# EAGLE board MotorControl_211009 (EAGLE 9.6.2)
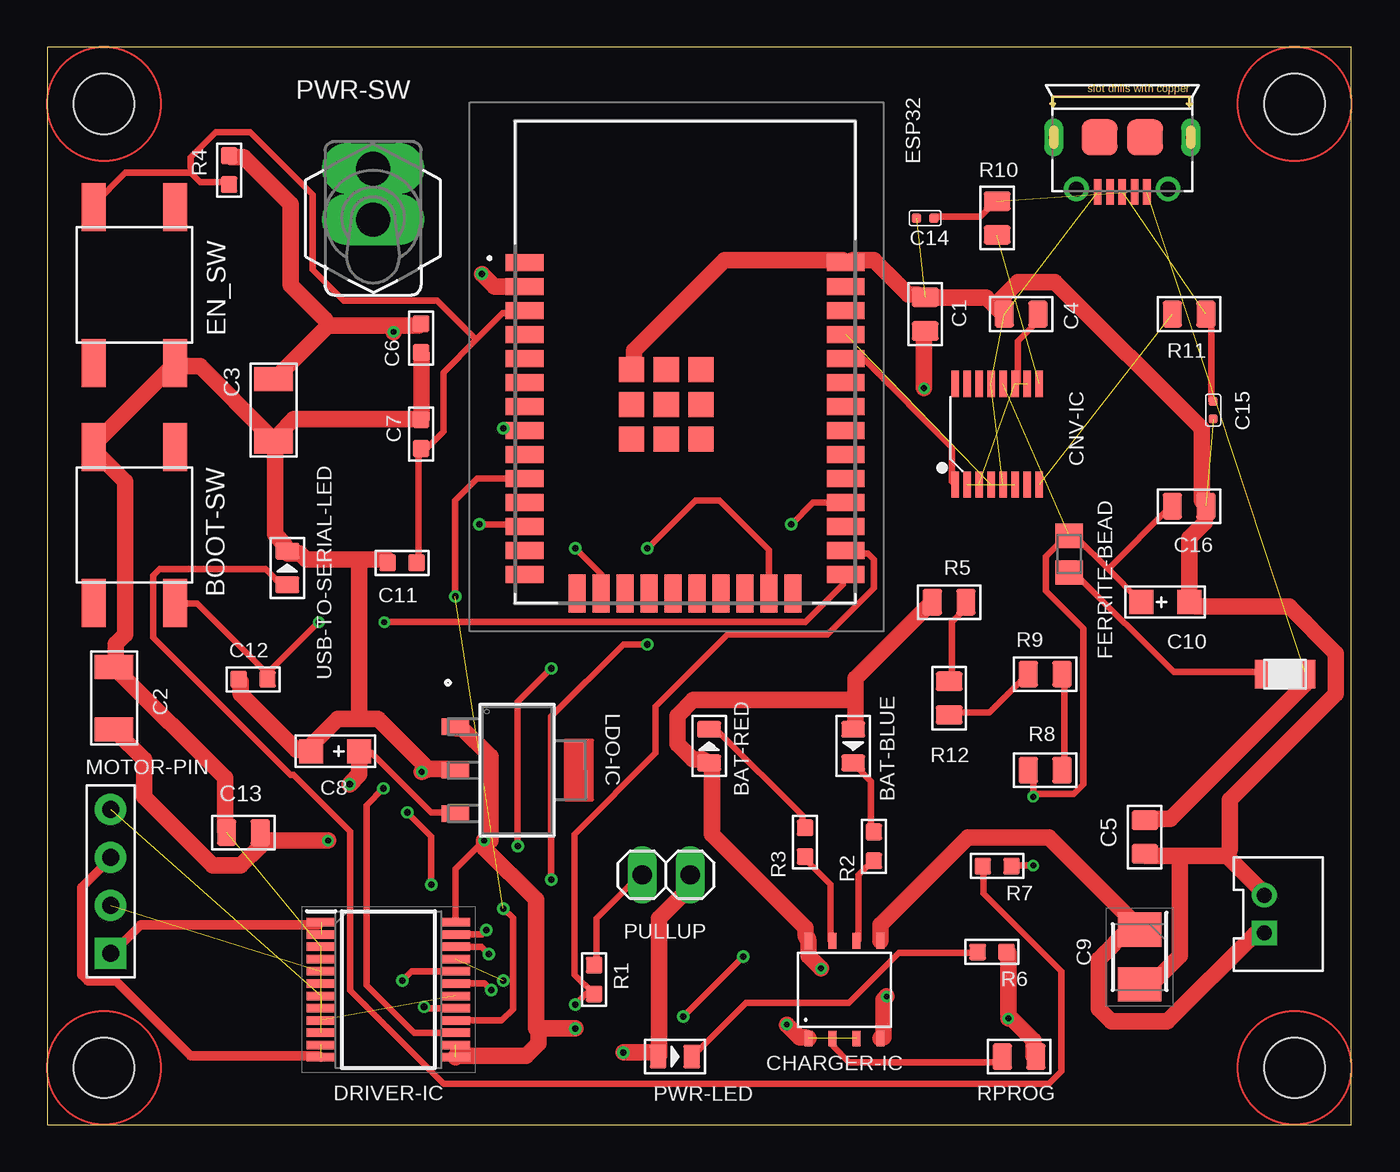
[diagram p0: board, top side]
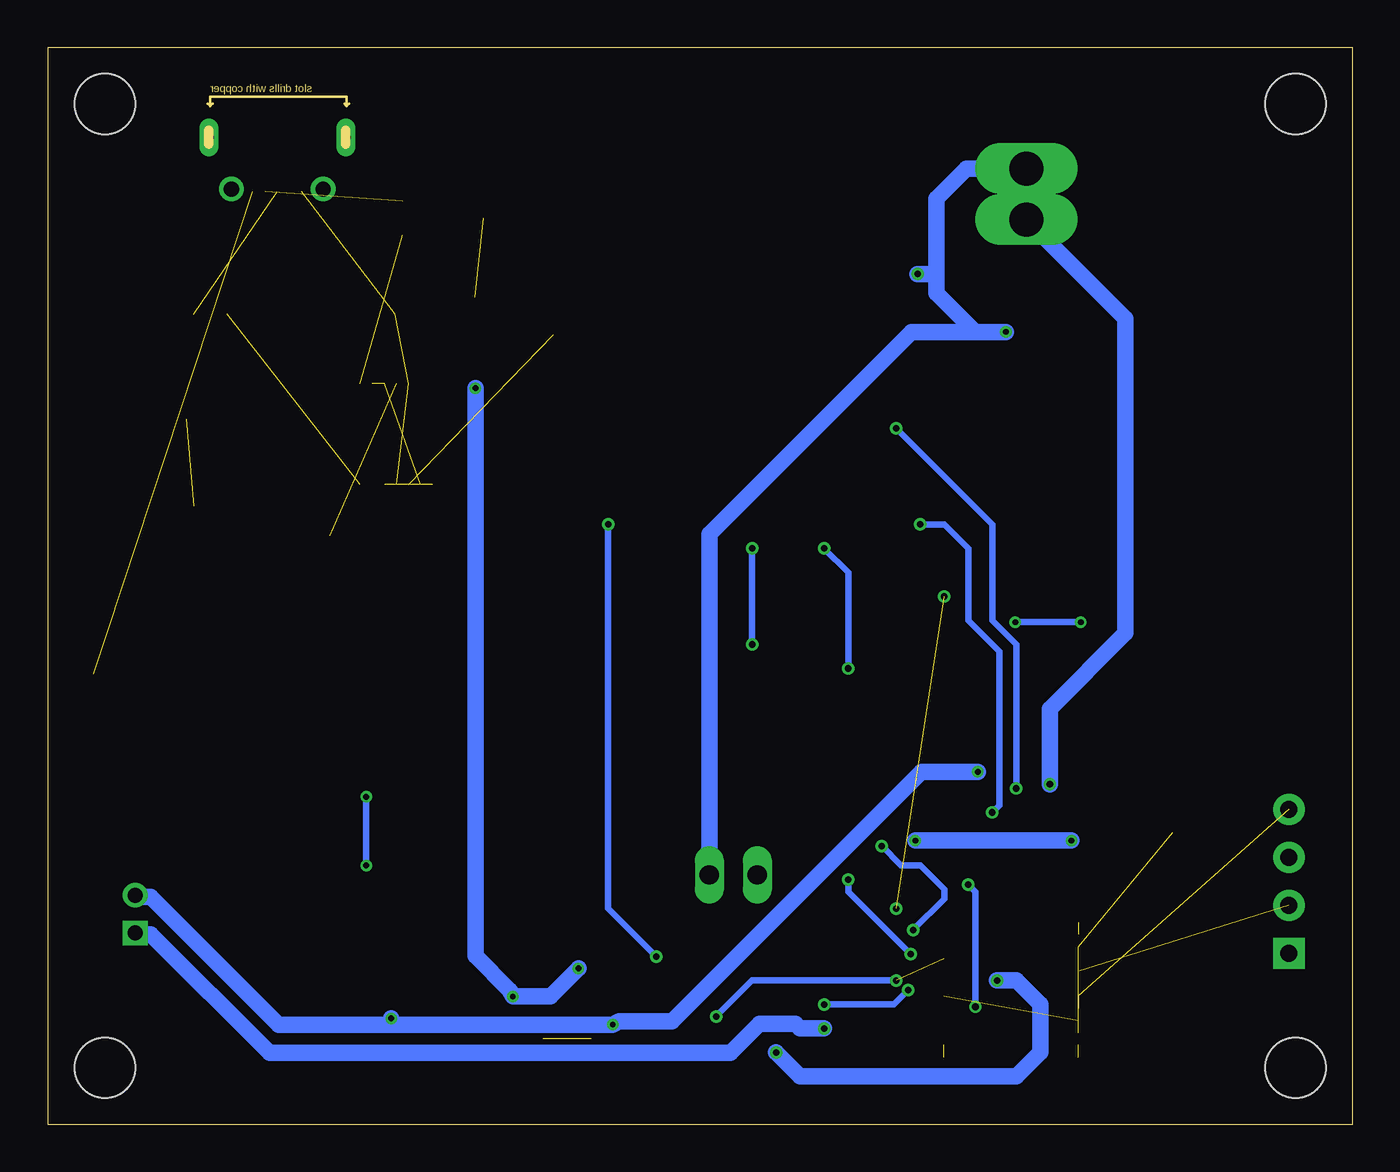
[diagram p1: board, bottom side, seen from below]

Size 69 x 57.02 mm. Coordinates in mm from the lower left corner, seen from the top.
Outline: 0,0 69,0.01 69,57.02 0.01,57.01 0,0
Copper layers (1*16): Top 0.035mm / dielectric 1.5mm / Bottom 0.035mm
Design rules "SeeedStudio_2layer_DRU_no_angle_20140221": minimum track width 6mil, minimum drill 12mil, track to track 6mil, track to pad 6mil, pad to pad 6mil, via to via 6mil, smd to smd 0mil, copper to edge 10mil, drill to drill 10mil, minimum pad ring 10mil, minimum via ring 6mil, stop-mask expansion 2mil, vias tented up to drill 100mil, thermal gap 10mil
Net classes: 0 default: width 0.356 mm, clearance 0.305 mm; 1 Power: width 0.864 mm, clearance 0.508 mm; 2 Motor: width 0.508 mm, clearance 0.356 mm
Holes 3.2 mm at 3,3.01 3,54.01 66,3.01 66,54.01

## Footprints (pad centres in the part's own frame; a part is rotated, then mirrored left to right if it is on the bottom)
H2-2.0-6X4.5MM = drill 0.8 pad 1.3 square: + -1,0.75 | drill 0.8 pad 1.3: - 1,0.75
LED-0805 = smd 0.889 x 1.27: + -0.889,0; - 0.889,0
SW4-SMD-6.0X6.0X5.0MM = smd 2.54 x 1.27: 1 -4.129,2.159; 2 -4.129,-2.159; 3 4.129,-2.159; 4 4.129,2.159
C0805 = smd 1.397 x 1.016: 1 0,0.889; 2 0,-0.889
C1206 = smd 1.27 x 2.032: 1 -1.651,0; 2 1.651,0
C0603 = smd 0.889 x 0.889: 1 0,0.762; 2 0,-0.762
AVX-A = smd 1.27 x 1.27: + -1.27,0; - 1.27,0
CAPPM3528X210N = smd 1.8 x 2.3: 1 -1.45,0; 2 1.45,0
C0402 = smd 0.5 x 0.5: 1 0,0.463; 2 0,-0.463
SOT23-8 = smd 0.42 x 0.835: 1 -1.905,-2.58; 2 -0.635,-2.58; 3 0.635,-2.58; 4 1.905,-2.58; 5 1.905,2.58; 6 0.635,2.58; 7 -0.635,2.58; 8 -1.905,2.58
SSOP16-0.635-5X4MM = smd 0.381 x 1.397: 1 -2.223,-2.667; 2 -1.587,-2.667; 3 -0.953,-2.667; 4 -0.318,-2.667; 5 0.318,-2.667; 6 0.953,-2.667; 7 1.587,-2.667; 8 2.223,-2.667; 9 2.223,2.667; 10 1.587,2.667; 11 0.953,2.667; 12 0.318,2.667; 13 -0.318,2.667; 14 -0.953,2.667; 15 -1.587,2.667; 16 -2.223,2.667
SOP65P760X160-24N = smd 1.525 x 0.45: 1 -3.562,3.575; 2 -3.562,2.925; 3 -3.562,2.275; 4 -3.562,1.625; 5 -3.562,0.975; 6 -3.562,0.325; 7 -3.562,-0.325; 8 -3.562,-0.975; 9 -3.562,-1.625; 10 -3.562,-2.275; 11 -3.562,-2.925; 12 -3.562,-3.575; 13 3.562,-3.575; 14 3.562,-2.925; 15 3.562,-2.275; 16 3.562,-1.625; 17 3.562,-0.975; 18 3.562,-0.325; 19 3.562,0.325; 20 3.562,0.975; 21 3.562,1.625; 22 3.562,2.275; 23 3.562,2.925; 24 3.562,3.575
ESP32WROOM32E8MB = smd 2 x 0.9: 1 -8.5,5.26; 2 -8.5,3.99; 3 -8.5,2.72; 4 -8.5,1.45; 5 -8.5,0.18; 6 -8.5,-1.09; 7 -8.5,-2.36; 8 -8.5,-3.63; 9 -8.5,-4.9; 10 -8.5,-6.17; 11 -8.5,-7.44; 12 -8.5,-8.71; 13 -8.5,-9.98; 14 -8.5,-11.25; 25 8.5,-11.25; 26 8.5,-9.98; 27 8.5,-8.71; 28 8.5,-7.44; 29 8.5,-6.17; 30 8.5,-4.9; 31 8.5,-3.63; 32 8.5,-2.36; 33 8.5,-1.09; 34 8.5,0.18; 35 8.5,1.45; 36 8.5,2.72; 37 8.5,3.99; 38 8.5,5.26 | smd 0.9 x 2: 15 -5.715,-12.25; 16 -4.445,-12.25; 17 -3.175,-12.25; 18 -1.905,-12.25; 19 -0.635,-12.25; 20 0.635,-12.25; 21 1.905,-12.25; 22 3.175,-12.25; 23 4.445,-12.25; 24 5.715,-12.25 | smd 1.33 x 1.33: 39 -2.835,-0.405; 40 -1,-0.405; 41 0.835,-0.405; 42 -2.835,-2.24; 43 -1,-2.24; 44 0.835,-2.24; 45 -2.835,-4.075; 46 -1,-4.075; 47 0.835,-4.075
FB_LI0805H151R-10 = smd 1.285 x 1.47: 1 -0.973,0; 2 0.973,0
SMD0805R035SF = smd 1 x 1.5: 1 -1.1,0; 2 1.1,0
SOT-223-3_VAR-AA = smd 0.889 x 1.473: 1 -2.3,-3.264; 2 0,-3.264; 3 2.3,-3.264
H4-2.54 = drill 0.889 pad 1.651 square: 1 0,3.81 | drill 0.889 pad 1.651: 2 0,1.27; 3 0,-1.27; 4 0,-3.81
1X02 = drill 1.016 long: 1 -1.27,0; 2 1.27,0
MS243 = drill 1.803 pad 2 long: 1 0,-1.346; 2 0,1.346
R0603 = smd 0.889 x 0.889: 1 0,0.762; 2 0,-0.762
R0805 = smd 1.397 x 1.016: 1 0,0.889; 2 0,-0.889
MICRO-USB5+6P-SMD-0.65-AB = smd 0.4 x 1.35: 1 -1.3,2.875; 2 -0.65,2.875; 3 0,2.875; 4 0.65,2.875; 5 1.3,2.875 | smd 1.9 x 1.9: P1 -1.2,0; P2 1.2,0 | drill 0.508 pad 1.016 long: P3 -3.625,0; P4 3.625,0 | drill 0.8: P5 -2.425,2.73; P6 2.425,2.73

## Placement (x,y rotation side)
BAT  2p-2.0  [H2-2.0-6X4.5MM]  65.15,11.14 90 top
BAT-BLUE  CLEAR-BLUE-0805  [LED-0805]  42.64,20.03 270 top
BAT-RED  RED-0805  [LED-0805]  35.02,20.03 90 top
BOOT-SW  [SW4-SMD-6.0X6.0X5.0MM]  4.62,31.73 90 top
C1  100nf  [C0805]  46.45,42.89 0 top
C2  10uf  [C1206]  3.54,22.57 270 top
C3  22uF/16V(10%)  [C1206]  11.97,37.81 90 top
C4  100nf  [C0805]  51.53,42.89 90 top
C5  10nf  [C0805]  58.07,15.22 0 top
C6  100nF/50V(10%)  [C0603]  19.78,41.62 180 top
C7  100nF/50V(10%)  [C0603]  19.78,36.54 0 top
C8  10uf  [AVX-A]  15.24,19.76 180 top
C9  6.8uF  [CAPPM3528X210N]  57.8,8.87 270 top
C10  4.7uf  [AVX-A]  59.15,27.65 0 top
C11  100nF/50V(10%)  [C0603]  18.78,29.73 90 top
C12  100nF/50V(10%)  [C0603]  10.89,23.57 90 top
C13  10uf  [C0805]  10.38,15.46 90 top
C14  47PF  [C0402]  46.45,47.97 270 top
C15  47PF  [C0402]  61.69,37.81 0 top
C16  100nf  [C0805]  60.42,32.73 270 top
CHARGER-IC  TP4056  [SOT23-8]  42.18,7.14 0 top
CNV-IC  INTERFACE-FT230XS-R(SSOP16)  [SSOP16-0.635-5X4MM]  50.26,36.54 0 top
DRIVER-IC  TB6612FNG  [SOP65P760X160-24N]  18.05,7.14 0 top
EN_SW  [SW4-SMD-6.0X6.0X5.0MM]  4.62,44.43 270 top
ESP32  ESP32-WROOM-32E8M  [ESP32WROOM32E8MB]  33.75,40.35 0 top
FERRITE-BEAD  LI0805H151R-10  [FB_LI0805H151R-10]  54.07,30.19 270 top
HUSE  SMD0805R035SF  [SMD0805R035SF]  65.5,23.84 0 top
LDO-IC  SPX3940AM3-L-3-3/TR  [SOT-223-3_VAR-AA]  24.86,18.76 270 top
MOTOR-PIN  4p-2.54  [H4-2.54]  3.35,12.87 180 top
PULLUP  [1X02]  32.75,13.22 180 top
PWR-LED  YELLOW-0805  [LED-0805]  33.21,3.6 0 top
PWR-SW  [MS243]  17.24,49.24 0 top
R1  10K  [R0603]  28.94,7.68 180 top
R2  1K  [R0603]  43.73,14.73 0 top
R3  1K  [R0603]  40.1,14.95 0 top
R4  10K  [R0603]  9.62,50.51 180 top
R5  0.1R  [R0805]  47.72,27.65 270 top
R6  300R  [R0603]  49.99,9.14 90 top
R7  1K  [R0603]  50.26,13.68 90 top
R8  0.1R  [R0805]  52.8,18.76 90 top
R9  0.1R  [R0805]  52.8,23.84 270 top
R10  27R  [R0805]  50.26,47.97 0 top
R11  27R  [R0805]  60.42,42.89 270 top
R12  0.1R  [R0805]  47.72,22.57 180 top
RPROG  1.2K  [R0805]  51.42,3.6 270 top
USB1  ZX62-B-5PA  [MICRO-USB5+6P-SMD-0.65-AB]  56.88,52.24 180 top
USB-TO-SERIAL-LED  GREEN-0805  [LED-0805]  12.7,29.46 90 top

## Library data of the parts
BAT = OPL_Connector
BAT-BLUE = OPL_Optoelectronics; MPN: EL-17-215/BHC-AN1P2/3T
BAT-RED = OPL_Optoelectronics; MPN: 17-215SURC/S530-A2/TR8
BOOT-SW EN_SW = OPL_Switch; MPN: DTSM-62K-S-V-T/R(SN431)
C1 C4 C16 = OPL_Capacitor; MPN: CC0805KRX7R9BB104
C2 = OPL_Capacitor; MPN: CC1206KKX5R8BB106
C3 = OPL_Capacitor
C5 = OPL_Capacitor; MPN: CC0805JRX7R9BB103
C6 C7 C11 C12 = OPL_Capacitor; MPN: CC0603KRX7R9BB104
C8 = OPL_Capacitor; MPN: TAJA106K016RNJ
C9 = TCJB685M025R0150; MPN: TCJB685M025R0150
C10 = OPL_Capacitor; MPN: TAJA475*016#NJ
C13 = OPL_Capacitor; MPN: CC0805KKX5R8BB106
C14 C15 = OPL_Capacitor; MPN: CC0402JRNPO9BN470
CHARGER-IC = TP4056
CNV-IC = INTERFACE-FT230XS-R_SSOP16_; AVAILABILITY: In Stock; DESCRIPTION: USB Bridge, USB to UART USB 2.0 UART Interface 16-SSOP; MF: FTDI,; MP: FT230XS-R; PACKAGE: SSOP-16 FTDI; PRICE: None; PURCHASE-URL: https://pricing.snapeda.com/search/part/FT230XS-R/?ref=eda
DRIVER-IC = TB6612FNG; DESCRIPTION: Brush motor driver IC; HEIGHT: 1.6mm; MANUFACTURER_NAME: Toshiba; MANUFACTURER_PART_NUMBER: TB6612FNG
ESP32 = ESP32-WROOM-32; DESCRIPTION: WiFi Modules (802.11) Mod 8 MB SPI flash PCB antenna; HEIGHT: 3.2mm; MANUFACTURER_NAME: Espressif Systems; MANUFACTURER_PART_NUMBER: ESP32-WROOM-32E (8MB); MOUSER_PART_NUMBER: 356-ESP32WRM32E164PH; MOUSER_PRICE-STOCK: https://www.mouser.co.uk/ProductDetail/Espressif-Systems/ESP32-WROOM-32E-8MB?qs=GBLSl2AkirsjshqvD9slKA%3D%3D
FERRITE-BEAD = LI0805H151R-10; AVAILABILITY: In Stock; DESCRIPTION: 150 Ohms @ 100MHz 1 Power, Signal Line Ferrite Bead 0805 (2012 Metric) 800mA 150mOhm; MF: Laird-Signal Integrity; MP: LI0805H151R-10; PACKAGE: 0805 Laird; PRICE: None; PURCHASE-URL: https://pricing.snapeda.com/search/part/LI0805H151R-10/?ref=eda
HUSE = SMD0805R035SF
LDO-IC = SPX3940AM3-L-3-3:TR; BUILT_BY: EMA_Jessica; COPYRIGHT: Copyright (C) 2018 Accelerated Designs. All rights reserved; MANUFACTURER_PART_NUMBER: SPX3940AM3-L-3-3/TR; SOURCELIBRARY: Exar_2019-09-16; VENDOR: Exar
MOTOR-PIN = OPL_Connector; MPN: F185-1104A1BSYA1
PULLUP = pinhead
PWR-LED = OPL_Optoelectronics; MPN: 17-215UYC/S530-A3/TR8
PWR-SW = switch
R1 R4 = OPL_Resistor; MPN: RC0603FR-0710KL
R2 R3 R7 = OPL_Resistor; MPN: RC0603FR-071KL
R5 R8 R9 R12 = OPL_Resistor; MPN: RL0805JR-070R1L
R6 = OPL_Resistor; MPN: RC0603FR-071K5L
R10 R11 RPROG = OPL_Resistor; MPN: RC0805JR-071KL
USB1 = OPL_Connector; MPN: ZX62-B-5PA
USB-TO-SERIAL-LED = OPL_Optoelectronics; MPN: 17-215SYGC/S530-E2/TR8

## Nets
+3V3 [Power]: C3.2 C6.2 DRIVER-IC.20 ESP32.2 PULLUP.1 PWR-LED.+ PWR-SW.2 R4.2
AIN1: DRIVER-IC.21 ESP32.28
AIN2: DRIVER-IC.22 ESP32.23
AO1 [Motor]: DRIVER-IC.1 DRIVER-IC.2 MOTOR-PIN.1
AO2 [Motor]: DRIVER-IC.5 DRIVER-IC.6 MOTOR-PIN.2
B+ [Power]: BAT.+ C2.2 C9.1 C13.2 CHARGER-IC.5 DRIVER-IC.13 DRIVER-IC.14 DRIVER-IC.24 LDO-IC.1
BIN1: DRIVER-IC.17 ESP32.12
BIN2: DRIVER-IC.16 ESP32.10
BO1 [Motor]: DRIVER-IC.11 DRIVER-IC.12 MOTOR-PIN.3
BO2 [Motor]: DRIVER-IC.7 DRIVER-IC.8 MOTOR-PIN.4
GND [Power]: BAT.- BOOT-SW.4 C1.1 C2.1 C3.1 C4.1 C5.2 C6.1 C7.1 C8.- C9.2 C10.- C11.1 C12.1 C13.1 C14.2 C15.2 C16.1 CHARGER-IC.1 CHARGER-IC.3 CNV-IC.5 CNV-IC.13 DRIVER-IC.3 DRIVER-IC.4 DRIVER-IC.9 DRIVER-IC.10 DRIVER-IC.18 EN_SW.4 ESP32.38 ESP32.39 LDO-IC.2 R6.2 RPROG.1 USB1.5 USB-TO-SERIAL-LED.-
N$2: BAT-RED.- R3.1
N$3: R7.1 USB-TO-SERIAL-LED.+
N$4: FERRITE-BEAD.2 HUSE.1
N$5: C4.2 CNV-IC.3 CNV-IC.10 CNV-IC.11
N$6: CNV-IC.2 CNV-IC.6
N$7: CNV-IC.9 R10.2
N$8: CNV-IC.8 R11.2
N$9: C14.1 R10.1 USB1.2
N$11: CHARGER-IC.7 R3.2
N$12: CHARGER-IC.6 R2.2
N$13: BAT-BLUE.- R2.1
N$14: PWR-LED.- R6.1
N$15: C15.1 R11.1 USB1.3
N$16: CHARGER-IC.2 RPROG.2
N$17: R8.2 R9.1
N$18: R9.2 R12.1
N$19: C10.+ C16.2 CNV-IC.12 FERRITE-BEAD.1 R7.2 R8.1
N$20: R5.1 R12.2
N$25: PULLUP.2 R1.2
N$29: C7.2 C11.2 EN_SW.2 ESP32.3 R4.1
N$30: BOOT-SW.2 C12.2 ESP32.25
POWER_SW: C8.+ LDO-IC.3 PWR-SW.1
PWMA: DRIVER-IC.23 ESP32.16
PWMB: DRIVER-IC.15 ESP32.8
RXD: CNV-IC.4 ESP32.35
STBY: DRIVER-IC.19 ESP32.26 R1.1
TXD: CNV-IC.1 ESP32.34
VBUS [Power]: C5.1 HUSE.2 USB1.1
VIN+ [Power]: BAT-BLUE.+ BAT-RED.+ C1.2 CHARGER-IC.4 CHARGER-IC.8 R5.2

## Tracks (layer width: path | path; a pad name or v marks a point on that pad's centre or on a via)
+3V3  (via drill 0.3, 0.35)
  Top 0.356: DRIVER-IC.20 19.28,8.12 v18.8,7.63 | 32.1,3.82 PWR-LED.+
  Top 0.864: PWR-LED.+ 32.36,3.65 32.36,10.91 34.01,12.56 PULLUP.1 | 14.86,42.28 18.33,42.28 | 18.33,42.28 19.65,42.28 C6.2 | 14.86,42.28 12.05,39.47 C3.2 | R4.2 9.74,51.2 10.4,51.2 12.88,48.72 12.88,44.43 14.69,42.61 14.86,42.28 | v18.33,41.95 18.33,42.28 | ESP32.2 23.67,44.34 v23,45.01 | v30.48,3.82 32.1,3.82
  Bottom 0.864: PULLUP.1 34.01,13.39 34.01,31.27 23.33,41.95 v18.33,41.95 19.93,41.95 22,44.01 22,45.01 | PWR-SW.2 20.42,50.59 22,49.01 22,45.01 | v23,45.01 22,45.01 | v18.8,7.63 17.78,7.63 16.51,6.36 16.51,3.82 17.78,2.55 29.21,2.55 v30.48,3.82
AIN1  (via drill 0.35)  (1 unrouted)
  Top 0.356: ESP32.28 40.52,32.91 v39.37,31.76 | v36.83,8.9 v33.66,5.73
  Bottom 0.356: v39.37,31.76 39.37,13.98 39.37,11.44 v36.83,8.9 | v33.66,5.73 31.75,7.63 v24.13,7.63
AIN2  (via drill 0.35)
  Top 0.356: DRIVER-IC.22 22.98,9.42 v23.37,9.03 | v26.67,12.97 26.67,21.6 30.48,25.41 v31.75,25.41 | v31.75,30.49 34.29,33.03 35.56,33.03 38.2,30.4 ESP32.23
  Bottom 0.356: v23.37,9.03 26.67,12.33 v26.67,12.97 | v31.75,25.41 v31.75,30.49
AO1  (1 unrouted)
  Top 0.508: DRIVER-IC.1 14.36,10.58 4.95,10.58 3.47,9.09 MOTOR-PIN.1
AO2  (2 unrouted)
B+  (via drill 0.3, 0.35)  (1 unrouted)
  Top 0.356: DRIVER-IC.24 21.61,13.54 v23.11,15.04
  Top 0.864: CHARGER-IC.5 44.08,9.75 44.08,10.58 48.7,15.2 53,15.2 57.78,10.41 C9.1 57.29,10.41 55.64,8.76 55.64,6.12 56.3,5.46 59.27,5.46 63.89,10.08 64.39,10.08 BAT.+ | C2.2 3.63,20.82 5.12,19.33 5.12,17.35 8.75,13.72 10.24,13.72 11.23,14.71 11.23,15.37 C13.2 11.56,15.04 v14.86,15.04 | LDO-IC.1 21.63,20.98 21.96,20.98 23.44,19.5 23.44,15.04 v23.11,15.04 23.11,14.66 25.86,11.91 25.86,5.09 25.98,5.09 | DRIVER-IC.13 21.63,3.65 25.32,3.65 25.98,4.31 25.98,5.09 | v27.94,5.09 25.98,5.09
  Bottom 0.864: v23.11,15.04 v14.86,15.04 | BAT.+ 64.39,10.08 63.56,10.08 57.29,3.81 32.91,3.81 31.37,5.35 29.46,5.35 29.21,5.09 v27.94,5.09
BIN1  (via drill 0.35)
  Top 0.356: DRIVER-IC.17 20.01,6.17 v19.94,6.24 | v20.32,12.71 20.32,15.25 v19.05,16.52 | ESP32.12 25.13,31.76 v22.86,31.76
  Bottom 0.356: v19.94,6.24 19.94,12.33 v20.32,12.71 | v19.05,16.52 18.67,16.9 18.67,25.03 20.32,26.68 20.32,30.49 21.59,31.76 v22.86,31.76
BIN2  (via drill 0.35)  (1 unrouted)
  Top 0.356: DRIVER-IC.16 24.05,5.52 24.64,6.11 24.64,10.94 v24.13,11.44 | ESP32.10 22.74,34.18 21.59,33.03 v21.59,27.95
BO1  (1 unrouted)
  Top 0.508: DRIVER-IC.12 14.36,3.65 7.59,3.65 3.63,7.61 2.15,7.61 1.82,7.94 1.82,12.56 3.3,14.05 MOTOR-PIN.3
BO2  (2 unrouted)
GND  (via drill 0.3)  (11 unrouted)
  Top 0.864: C13.1 9.41,15.53 9.41,18.34 3.63,24.12 C2.1 3.63,24.61 3.63,25.44 4.13,25.93 4.13,34.03 2.64,35.51 BOOT-SW.4 2.48,36.01 EN_SW.4 7.1,40.13 8.09,40.13 11.72,36.5 C3.1 | C12.1 10.24,23.46 10.24,22.8 13.21,19.83 13.87,19.83 C8.- 14.03,20.16 15.35,21.48 16.51,21.48 | 20.14,18.84 21.46,18.84 LDO-IC.2 | 20.14,18.84 17.5,21.48 16.51,21.48 | C6.1 19.81,40.79 19.81,37.33 C7.1 19.48,37.33 13.04,37.33 12.22,36.5 C3.1 | 16.51,29.9 13.7,29.9 13.37,30.23 12.71,30.23 USB-TO-SERIAL-LED.- 12.55,30.72 12.05,31.22 12.05,36.01 C3.1 | 16.51,29.9 18,29.9 C11.1 | 16.51,29.9 16.51,21.48 | 50.85,5.79 50.85,9.09 R6.2 | 50.85,5.79 52.17,4.47 52.17,3.65 RPROG.1 | v39.13,5.3 39.79,4.64 40.12,4.64 CHARGER-IC.1 | 62.41,14.21 59.93,14.21 | 59.93,14.21 58.12,14.21 C5.2 | 62.41,14.21 64.39,12.23 BAT.- | 59.93,14.21 59.93,8.93 58.45,7.44 57.95,7.44 C9.2 | v50.85,5.63 50.85,5.79 | 50.11,43.35 50.52,42.94 C4.1 | 50.11,43.35 49.7,43.77 46.56,43.77 C1.1 46.06,43.93 45.57,43.93 43.75,45.75 42.6,45.75 ESP32.38 42.1,45.75 35.83,45.75 31.04,40.96 31.04,39.97 ESP32.39 | 50.11,43.35 51.35,44.59 53.33,44.59 61.09,36.83 61.09,33.03 C16.1 61.25,32.7 61.25,31.88 60.43,31.05 60.43,27.75 C10.- 60.76,27.42 65.71,27.42 68.19,24.94 68.19,22.8 62.57,17.18 62.57,14.54 62.41,14.21 | v19.81,18.67 20.14,18.84
  Bottom 0.864: 50.85,5.3 56.79,5.3 63.56,12.07 64.39,12.07 BAT.- | 50.85,5.3 v39.13,5.3 38.8,5.46 35.99,5.46 22.78,18.67 v19.81,18.67 | v50.85,5.63 50.85,5.3
N$2
  Top 0.356: R3.1 39.95,15.86 39.95,16.36 35.5,20.82 35.17,20.82 BAT-RED.-
N$3
  Top 0.356: R7.1 49.53,13.55 49.53,12.23 53.66,8.1 53.66,2.82 53,2.16 20.97,2.16 16.02,7.11 16.02,15.53 13.04,18.5 12.88,18.5 5.61,25.77 5.61,29.07 5.94,29.4 11.56,29.4 12.55,28.41 USB-TO-SERIAL-LED.+
N$4
  Top 0.356: FERRITE-BEAD.2 54.15,29.07 54.48,29.07 59.6,23.95 64.39,23.95 HUSE.1
N$5  (2 unrouted)
  Top 0.356: CNV-IC.11 51.35,39.31 51.35,41.45 52.34,42.45 52.34,42.78 C4.2
N$6  (1 unrouted)
N$7  (1 unrouted)
N$8  (1 unrouted)
N$9  (1 unrouted)
  Top 0.356: C14.1 47.05,48.06 49.37,48.06 50.19,48.88 R10.1
N$11
  Top 0.356: CHARGER-IC.7 41.44,9.75 41.44,12.73 40.12,14.05 R3.2
N$12
  Top 0.356: CHARGER-IC.6 42.93,9.75 42.93,13.22 43.59,13.88 R2.2
N$13
  Top 0.356: R2.1 43.59,15.53 43.59,18.18 42.76,19 BAT-BLUE.-
N$14
  Top 0.356: R6.1 49.2,9.09 45.07,9.09 42.43,6.45 36.98,6.45 34.18,3.65 PWR-LED.-
N$15  (1 unrouted)
  Top 0.356: C15.1 61.58,38.32 61.58,42.61 61.42,42.78 R11.1
N$16
  Top 0.356: CHARGER-IC.2 41.6,4.47 41.6,4.14 42.43,3.32 50.35,3.32 50.52,3.48 RPROG.2
N$17
  Top 0.356: R8.2 53.82,18.84 53.82,23.79 R9.1
N$18
  Top 0.356: R12.1 47.88,21.81 49.86,21.81 51.84,23.79 R9.2
N$19  (via drill 0.3)  (1 unrouted)
  Top 0.356: v52.17,13.72 51.18,13.72 R7.2 | R8.1 52.01,18.67 52.17,18.5 v52.17,17.35 52.34,17.52 54.32,17.52 54.81,18.01 54.81,26.27 52.83,28.25 52.83,30.06 53.99,31.22 FERRITE-BEAD.1 54.15,31.05 54.48,31.05 56.13,29.4 | 56.13,29.4 57.78,27.75 C10.+ | 56.13,29.4 59.44,32.7 C16.2
  Bottom 0.356: v52.17,17.35 v52.17,13.72
N$20
  Top 0.356: R12.2 47.88,23.62 47.88,26.59 48.54,27.25 48.54,27.59 R5.1
N$25
  Top 0.356: R1.2 29.06,8.6 29.06,10.91 31.37,13.22 PULLUP.2
N$29
  Top 0.356: 7.59,50.37 8.09,49.87 9.58,49.87 R4.1 | 7.59,50.37 4.13,50.37 2.48,48.72 EN_SW.2 | C11.2 19.65,29.9 19.65,35.68 C7.2 19.81,35.51 20.97,36.67 20.97,39.8 22.7,41.54 | 22.7,41.54 24.11,42.94 25.09,42.94 ESP32.3 | 7.59,50.37 7.59,51.2 8.91,52.52 10.73,52.52 14.03,49.21 14.03,45.25 15.68,43.6 20.64,43.6 22.7,41.54
N$30  (via drill 0.3)
  Top 0.356: BOOT-SW.2 6.93,27.59 7.92,27.59 11.56,23.95 11.56,23.62 C12.2 11.72,23.95 v14.36,26.59 | v17.83,26.59 40.12,26.59 42.1,28.58 42.1,29.07 ESP32.25
  Bottom 0.356: v14.36,26.59 v17.83,26.59
POWER_SW  (via drill 0.35)
  Top 0.356: C8.+ 16.51,19.66 17.17,19.66 20.31,16.52 21.46,16.52 LDO-IC.3
  Top 0.864: C8.+ 16.51,18.52 v16,18.01
  Bottom 0.864: PWR-SW.1 12,42.66 12,26.01 16,22.01 v16,18.01
PWMA  (via drill 0.35)
  Top 0.356: DRIVER-IC.23 23.01,10.07 v23.24,10.3 | v24.89,14.75 24.89,22.37 v26.67,24.14 | v27.94,30.49 29.3,29.13 ESP32.16
  Bottom 0.356: v23.24,10.3 21.59,11.95 21.59,12.46 22.86,13.73 23.88,13.73 v24.89,14.75 | v26.67,24.14 26.67,29.22 v27.94,30.49
PWMB  (via drill 0.35)
  Top 0.356: DRIVER-IC.15 19.4,4.87 16.89,7.38 16.89,16.9 v17.78,17.79 | ESP32.8 24.25,36.72 v24.13,36.84
  Bottom 0.356: v17.78,17.79 17.78,25.41 19.05,26.68 19.05,31.76 v24.13,36.84
RXD  (1 unrouted)
STBY  (via drill 0.35)
  Top 0.356: ESP32.26 42.27,30.23 43.42,30.23 43.75,29.9 43.75,28.41 41.27,25.93 35.99,25.93 32.19,22.14 32.19,19.66 27.9,15.37 27.9,7.94 28.89,6.95 R1.1 28.5,6.92 v27.94,6.36 | DRIVER-IC.19 23.15,7.47 v23.5,7.13
  Bottom 0.356: v23.5,7.13 24.26,6.36 v27.94,6.36
TXD
  Top 0.356: CNV-IC.1 47.88,34.03 47.88,35.84 43.26,40.46 42.27,40.46 ESP32.34
VBUS  (1 unrouted)
  Top 0.864: C5.1 58.12,16.19 59.44,16.19 66.53,23.29 66.53,23.79 HUSE.2
VIN+  (via drill 0.3)
  Top 0.864: 42.76,22.47 42.76,23.62 46.72,27.59 R5.2 | 42.76,22.47 42.76,20.98 BAT-BLUE.+ | v44.41,6.78 44.25,6.62 44.25,4.64 CHARGER-IC.4 | v40.95,8.27 40.28,8.93 40.28,9.59 CHARGER-IC.8 40.12,10.08 40.12,10.41 35.17,15.37 35.17,19 BAT-RED.+ 34.67,19.33 34.18,19.33 33.35,20.16 33.35,21.64 34.18,22.47 42.76,22.47 | v46.39,38.98 46.39,41.95 C1.2
  Bottom 0.864: v40.95,8.27 42.43,6.78 v44.41,6.78 44.58,7.11 46.39,8.93 v46.39,38.98
(copper drawn outside any net)
  shapes: Top circle x4

## Text on the board
tValues: BO2 | BO1 | - | AO2 | AO1 | +